# EAGLE board astable 555 timer phase 1 (EAGLE 9.6.2)
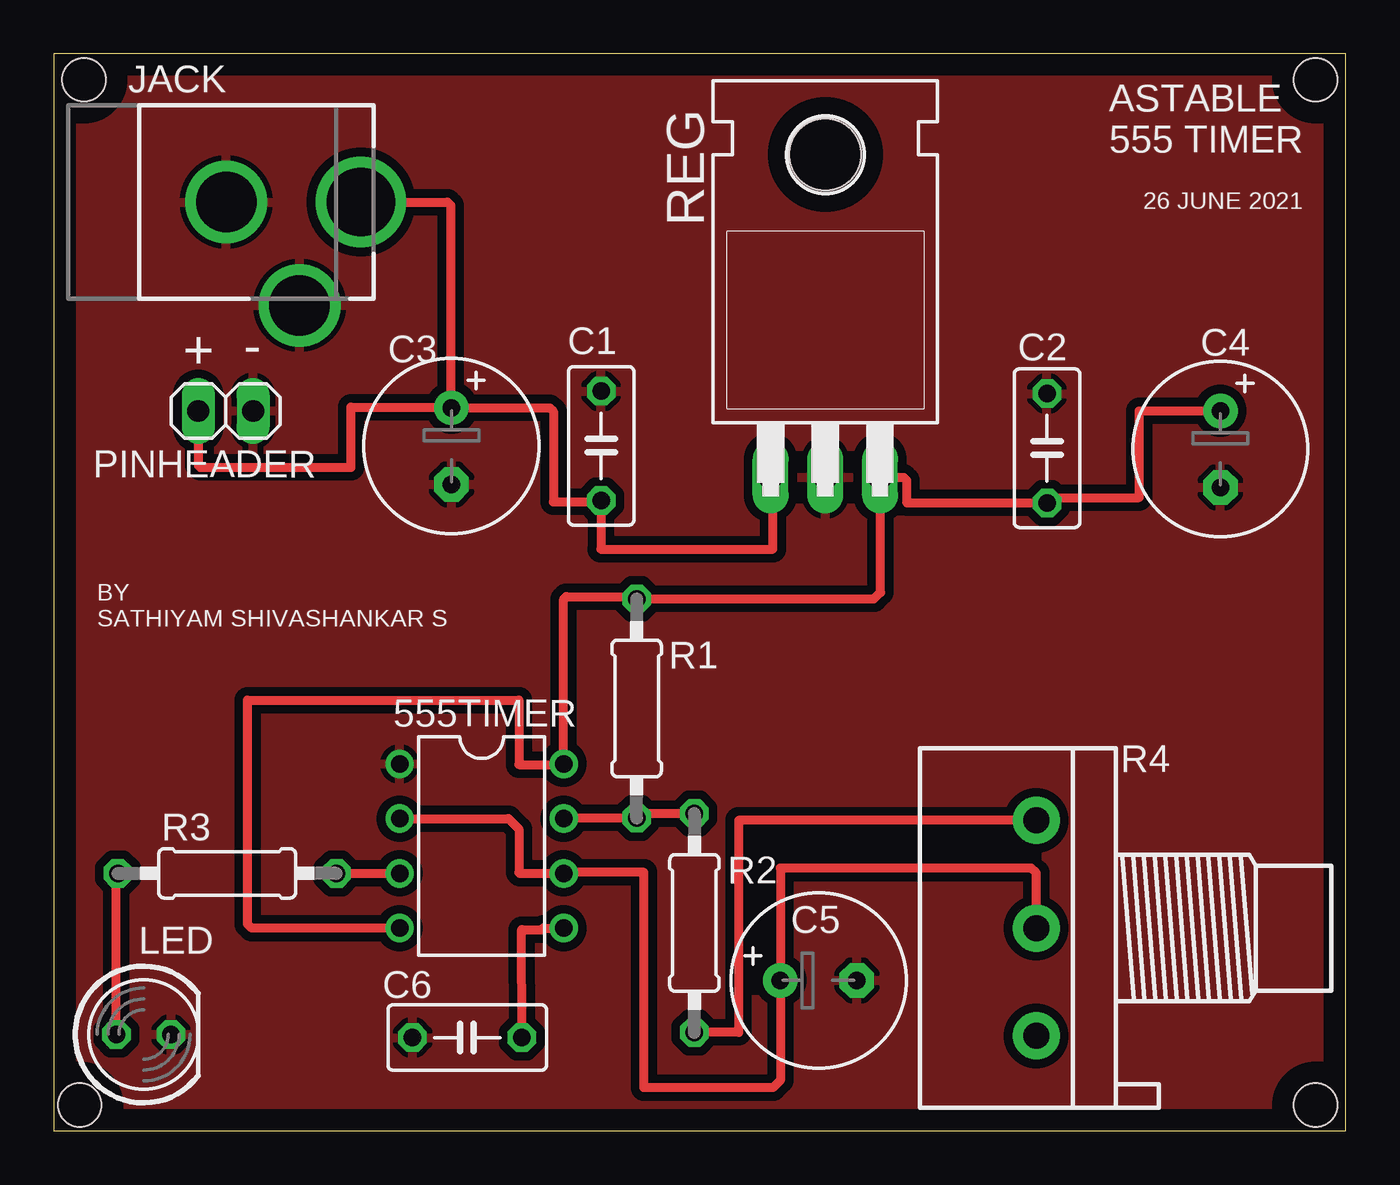
[diagram p0: board, top side]

Size 60 x 50 mm. Coordinates in mm from the lower left corner, seen from the top.
Outline: 0,0 60,0 60,50 0,50 0,0
Copper layers (1*16): Top 0.035mm / dielectric 1.5mm / Bottom 0.035mm
Design rules "default": minimum track width 6mil, minimum drill 0.35mm, track to track 6mil, track to pad 6mil, pad to pad 6mil, via to via 6mil, smd to smd 6mil, copper to edge 40mil, drill to drill 6mil, minimum pad ring 10mil, minimum via ring 8mil, stop-mask expansion 4mil, vias tented up to drill 0mil, thermal gap 10mil
Net classes: 0 default: width 0.305 mm, drill 0.305 mm, clearance 0.254 mm; 1 power: width 0.406 mm, drill 0.406 mm, clearance 0.305 mm
Holes 2 mm at 1.4,48.8 58.6,48.8 58.6,1.2 1.2,1.2

## Footprints (pad centres in the part's own frame; a part is rotated, then mirrored left to right if it is on the bottom)
DIL08 = drill 0.813 pad 1.27: 1 -3.81,-3.81; 2 -1.27,-3.81; 3 1.27,-3.81; 4 3.81,-3.81; 5 3.81,3.81; 6 1.27,3.81; 7 -1.27,3.81; 8 -3.81,3.81
C050-030X075 = drill 0.813 octagon: 1 -2.54,0; 2 2.54,0
E3,5-8 = drill 0.813 pad 1.6: + -1.778,0 | drill 0.813 pad 1.6 octagon: - 1.778,0
DCJACK_2MM_PTH = drill 2.8: GND 0,7.35; GNDBREAK 4.8,10.75 | drill 3.2: PWR 0,13.6
LED5MM = drill 0.813 octagon: A -1.27,0; K 1.27,0
1X02 = drill 1.016 long: 1 -1.27,0; 2 1.27,0
0207/10 = drill 0.813 octagon: 1 -5.08,0; 2 5.08,0
3RP/1610N = drill 1.2 pad 2.184: 1 -5,0; 2 0,0; 3 5,0
TO220H = drill 1.118 long: 1 -2.54,-10.16; 2 0,-10.16; 3 2.54,-10.16 | hole 3.302: 0,4.826

## Placement (x,y rotation side)
555TIMER  NE555N  [DIL08]  19.87,13.22 270 top
C1  0.1uF  [C050-030X075]  25.42,31.8 90 top
C2  0.1uF  [C050-030X075]  46.13,31.69 90 top
C3  10uF  [E3,5-8]  18.47,31.79 270 top
C4  10uF  [E3,5-8]  54.18,31.65 270 top
C5  10uF  [E3,5-8]  35.52,6.98 0 top
C6  0.1uF  [C050-030X075]  19.2,4.33 180 top
JACK  0.2 mm  [DCJACK_2MM_PTH]  0.66,43.12 270 top
LED  [LED5MM]  4.17,4.47 0 top
PINHEADER  2p  [1X02]  7.98,33.42 180 top
R1  10 K  [0207/10]  27.07,19.61 90 top
R2  1K  [0207/10]  29.75,9.65 270 top
R3  330 K  [0207/10]  8.05,11.95 0 top
R4  100 K  [3RP/1610N]  45.63,9.41 90 top
REG  7806T  [TO220H]  35.83,40.5 0 top

## Library data of the parts
555TIMER REG = linear
C1-C6 = rcl; SPICEPREFIX: C
JACK = adafruit
LED = led
PINHEADER = pinhead
R1-R3 = rcl; SPICEPREFIX: R
R4 = pot

## Nets
+5V [power]: 555TIMER.4 555TIMER.8 C2.1 C4.+ R1.2 REG.3
+12V [power]: C1.1 C3.+ JACK.PWR PINHEADER.2 REG.1
CV: 555TIMER.5 C6.1
GND [power]: 555TIMER.1 C1.2 C2.2 C3.- C4.- C5.- C6.2 JACK.GND JACK.GNDBREAK LED.K PINHEADER.1 REG.2
N$2: 555TIMER.7 R1.1 R2.1
N$3: R2.2 R4.3
N$4: LED.A R3.1
OUT: 555TIMER.3 R3.2
TH: 555TIMER.2 555TIMER.6 C5.+ R4.2

## Tracks (layer width: path | path; a pad name or v marks a point on that pad's centre or on a via)
+5V
  Top 0.406: C4.+ 50.41,33.43 50.41,29.41 50.4,29.4 46.38,29.4 C2.1 39.64,29.15 39.6,29.19 39.6,30.2 39.46,30.34 REG.3 38.4,30.31 38.4,25 38.09,24.69 R1.2 26.96,24.8 23.8,24.8 23.68,24.68 555TIMER.8 23.65,17 21.6,17 21.6,20 9,20 9,9.6 9.19,9.41 555TIMER.4
+12V
  Top 0.406: PINHEADER.2 6.71,30.89 6.8,30.8 13.8,30.8 13.8,33.6 18.44,33.6 | 18.44,33.6 C3.+ 23.03,33.57 23.2,33.4 23.2,29.2 25.36,29.2 C1.1 | JACK.PWR 18.28,43.12 18.44,42.96 18.44,33.6 | 24.94,29.26 C1.1 | REG.1 33.29,30.29 33.4,30.18 33.4,27 25.4,27 25.42,27.02 C1.1
CV
  Top 0.406: C6.1 21.73,9.34 22.67,9.34 22.74,9.41 555TIMER.5
GND
  pour Top (isolate 0.406): 0.2,49.8 59.8,49.8 59.8,0.2 0.2,0.2
N$2
  Top 0.406: R2.1 27.27,14.73 R1.1 23.72,14.53 555TIMER.7
N$3
  Top 0.406: R4.3 31.81,14.41 31.8,14.4 31.8,4.57 R2.2
N$4
  Top 0.406: LED.A 2.9,11.88 R3.1
OUT
  Top 0.406: R3.2 555TIMER.3
TH
  Top 0.406: 555TIMER.2 21.11,14.49 21.6,14 21.6,12 21.65,11.95 555TIMER.6 23.73,12 27.4,12 27.4,2 33.4,2 33.74,2.34 C5.+ 33.74,12.2 45.4,12.2 45.63,11.97 R4.2 45.63,10.37

## Text on the board
tNames: ASTABLE / 555 TIMER | 26 JUNE 2021 | - | + | BY / SATHIYAM SHIVASHANKAR S